# Altium PCB Proj_USB_GPIB.PcbDoc
Units mil, origin at the board's own origin, x right, y up, seen from the top; angles counter-clockwise.
Board outline 2800 x 2200 mil, 2 copper layers (Top Layer, Bottom Layer); 46 components, 61 nets, 226 pads, 77 vias.
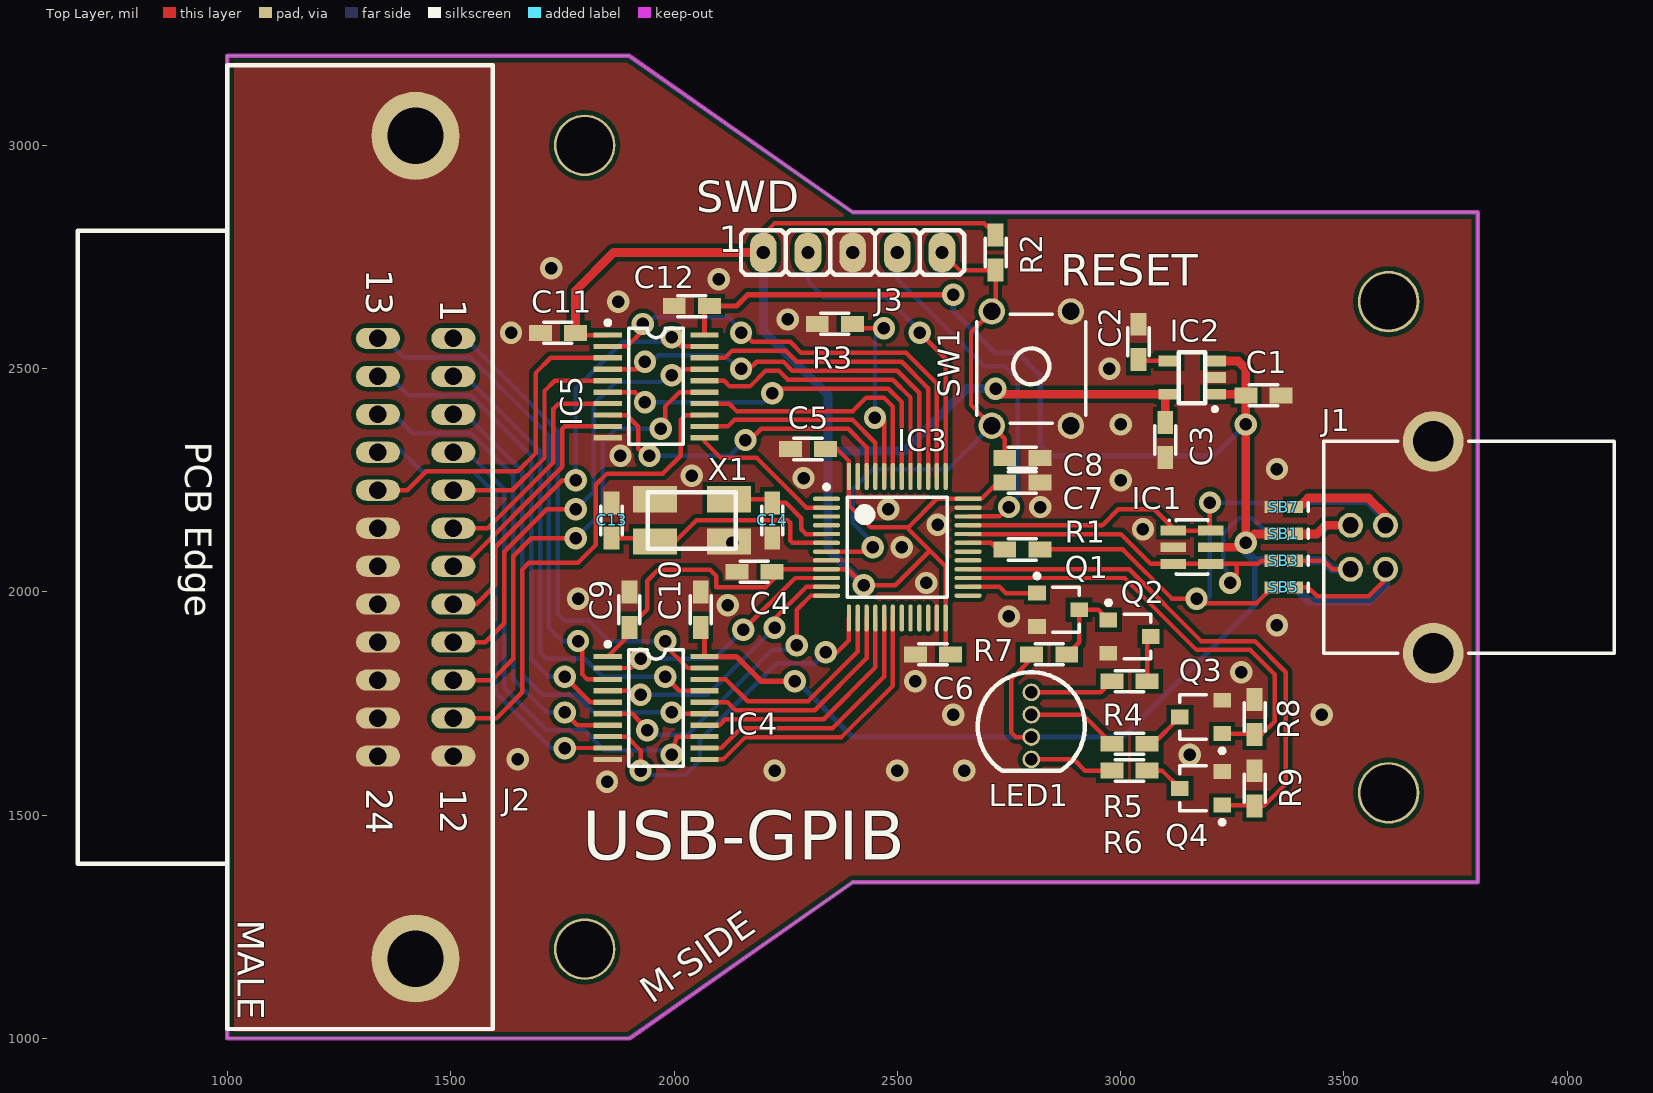
[diagram p0: Top Layer view]
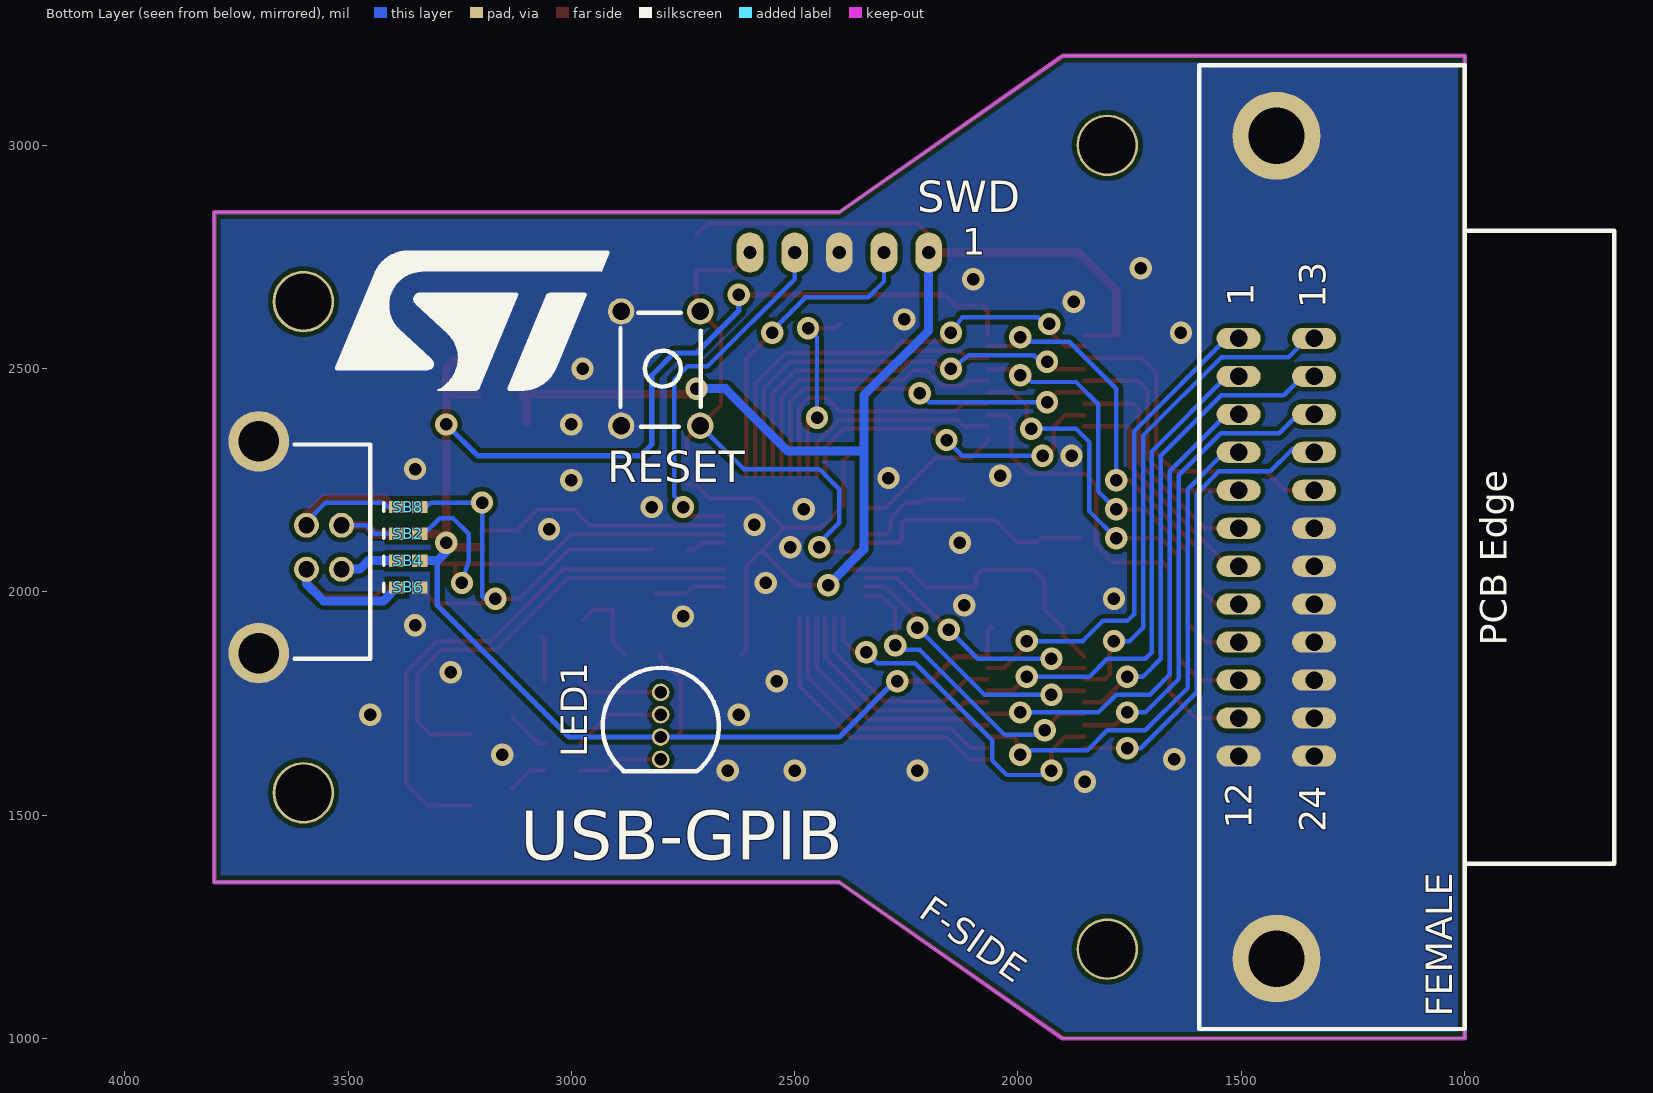
[diagram p1: Bottom Layer view, seen from below]

## Layer stack, top to bottom
Top Layer: signal copper 1.4
Dielectric: dielectric 12.6, FR-4, Dk 4.8
Bottom Layer: signal copper 1.4

## Board outline
1000,1000 1900,1000 2400,1350 3800,1350 3800,2850 2400,2850 1900,3200 1000,3200

## Design rules (kind name [scope] priority, off if disabled: settings)
Clearance [All] p1: gap=10
ComponentClearance [All] p1: gap=10 collisioncheckmode=3 verticalgap=10
HoleSize [All] p1: absolutevalues=TRUE maxlimit=196.85 minlimit=0.98 maxpercent=80.000 minpercent=20.000
PolygonConnect [All] p1: connectstyle=Direct reliefconductorwidth=10 reliefentries=4 polygonreliefangle="90 Angle"
RoutingVias [All] p1: holewidth=12 width=24 viastyle="Through Hole" minholewidth=12 minwidth=24 maxholewidth=12 maxwidth=24
SolderMaskExpansion [All] p1: expansion=4
TestPointUsage [All] p1: valid=0 allowmultiple=FALSE
Testpoint [All] p1: side=15 testpointundercomponent=TRUE minsize=40 maxsize=100 preferedsize=60 minholesize=0 maxholesize=40 preferedholesize=32 testpointgrid=1 style=1023 order=0123456789
Width [All] p1: maxlimit=50 minlimit=10 preferedwidth=10 minimp=50.000000 maximp=50.000000 favimp=50.000000
17 further rules are at their usual default settings.

## Components (designator, comment, footprint, x,y, rotation, side; value= is the part's Value field where it differs from the comment)
C1 "Cap" 0603 3320,2440 r0 top
C2 "Cap" 0603 3040,2560 r90 top
C3 "Cap" 0603 3100,2340 r270 top
C4 "Cap" 0603 2180,2045 r180 top
C5 "Cap" 0603 2300,2320 r180 top
C6 "Cap" 0603 2580,1860 r180 top
C7 "Cap" 0603 2780,2245 r0 top
C8 "Cap" 0603 2780,2300 r180 top
C9 "Cap" 0603 1900,1960 r90 top
C10 "Cap" 0603 2060,1960 r90 top
C11 "Cap" 0603 1740,2580 r180 top
C12 "Cap" 0603 2040,2640 r180 top
C13 "Cap" 0603 1860,2160 r90 top
C14 "Cap" 0603 2220,2160 r270 top
IC1 "USBLC6-2" SOT23-6 3160,2100 r270 top
IC2 "LDK130" SOT23-5 3160,2480 r90 top
IC3 "STM32F103C6T6A" STM-LQFP48_L 2500,2100 r0 top
IC4 "ST2378E" TSSOP20 1960,1740 r270 top
IC5 "ST2378E" TSSOP20 1960,2460 r270 top
J1 "USB 2.0 B" 61400416121 3780,2100 r90 top
J2 "Centronix 24P Male GPIB" Norcomp-112-024-213R001 1000,2100 r270 top
J3 "SWD" PIN_HEADER_5P 2400,2760 r0 top
LED1 "RGB LED 5mm CA" RGB_LED_5mm 2800,1700 r90 top
Q1 "BSS138" SOT23-3 2860,1960 r270 top
Q2 "BSS138" SOT23-3 3020,1900 r270 top
Q3 "BSS138" SOT23-3 3180,1720 r90 top
Q4 "BSS138" SOT23-3 3180,1560 r90 top
R1 "Res" 0603 2780,2095 r180 top
R2 "Res" 0603 2720,2760 r90 top
R3 "Res" 0603 2360,2600 r180 top
R4 "Res" 0603 3020,1800 r0 top
R5 "Res" 0603 3020,1660 r0 top
R6 "Res" 0603 3020,1600 r0 top
R7 "Res" 0603 2840,1860 r180 top
R8 "Res" 0603 3300,1720 r270 top
R9 "Res" 0603 3300,1560 r270 top
SB1 "SHORT_CON2" 0402 3365,2130 r180 top
SB2 "SHORT_CON2" 0402 3365,2130 r180 bottom
SB3 "SHORT_CON2" 0402 3365,2070 r180 top
SB4 "SHORT_CON2" 0402 3365,2070 r180 bottom
SB5 "SHORT_CON2" 0402 3365,2010 r180 top
SB6 "SHORT_CON2" 0402 3365,2010 r180 bottom
SB7 "SHORT_CON2" 0402 3365,2190 r180 top
SB8 "SHORT_CON2" 0402 3365,2190 r180 bottom
SW1 "6x6mm THT" 4301x60957x6 2800,2500 r270 top
X1 "8MHz" CRYSTAL_5x3.2mm 2040,2160 r0 top

## Footprints (in the part's own frame and the unit in brackets; to place one, negate y for a bottom-side part, rotate by r counter-clockwise, add the part's x,y. Pads: shape width x height; smd on the part's side, far side on the other; paste and mask are expansions set on the pad)
0402 [mm] "Chip Capacitor; Body 1.0 x 0.5 mm (LxW typ)"
  rect 0.9x0.7 smd: 1(-0.65,0) 2(0.65,0)
  silkscreen extent -1.4,-0.25 -1.4,0.25
0603 [mm]
  rect 1.3x0.9 smd: 1(-1,0) 2(1,0)
  silkscreen extent -0.8,-0.6 0.8,0.6, body extent -0.8,-0.4 0.8,0.4, height 0.5
4301x60957x6 [mm] "6x6mm Tact Switch, THT version"
  round 1.5 hole 1: 1(-3.25,2.25) 2(-3.25,-2.25) 3(3.25,2.25) 4(3.25,-2.25)
  silkscreen extent -3.1,-3.1 3.1,3.1, body extent -3.95,-3.1 3.95,3.1, height 9.55
61400416121 [mm] "USB 2.0 Type B Horizontal"
  round 1.42 hole 0.92: 1(1.25,6.74) 2(-1.25,6.74) 3(-1.25,4.74) 4(1.25,4.74)
  round 3.45 hole 2.3: Shell(-6.02,2.03) Shell(6.02,2.03)
  silkscreen extent -6.02,-8.25 6.02,8.25, body extent -7.48,-8.25 7.48,8.25, height 11.15
CRYSTAL_5x3.2mm [mm] "Quartz SMD Crystal 5x3.2mm"
  rect 2.5x1.5 smd: 1(-2.1,-1.2) 2(2.1,-1.2) 3(2.1,1.2) 4(-2.1,1.2)
  silkscreen extent -2.5,-1.6 2.5,1.6, body extent -2.63,-1.73 2.63,1.73
Norcomp-112-024-213R001 [mm] "Centronix 24P Male THT GPIB Connector"
  oval 1.2x2.5 hole 1: 1(-11.88,12.85) 2(-9.72,12.85) 3(-7.56,12.85) 4(-5.4,12.85) 5(-3.24,12.85) 6(-1.08,12.85) 7(1.08,12.85) 8(3.24,12.85) 9(5.4,12.85) 10(7.56,12.85) 11(9.72,12.85) 12(11.88,12.85) 13(-11.88,8.56) 14(-9.72,8.56) 15(-7.56,8.56) 16(-5.4,8.56) 17(-3.24,8.56) 18(-1.08,8.56) 19(1.08,8.56) 20(3.24,8.56) 21(5.4,8.56) 22(7.56,8.56) 23(9.72,8.56) 24(11.88,8.56)
  round 5 hole 3.2: SH(-23.4,10.7) SH(23.4,10.7)
  silkscreen extent -27.4,-8.5 27.4,15.1
PIN_HEADER_5P [mil]
  oval 60x90 hole 30: 1(-200,0) 2(-100,0) 3(0,0) 4(100,0) 5(200,0)
  silkscreen extent -250,-50 250,50, body extent -250,-50 250,50
RGB_LED_5mm [mm] "RGB LED 5mm Common Anode"
  round 1 hole 0.7: 1(-1.905,0) 2(-0.635,0) 3(0.635,0) 4(1.905,0)
  silkscreen extent -2.54,-3.05 3.04,3.05, body extent -2.54,-3.02 3.05,3.05
SOT23-3 [mm] "SOT-23; 3 Leads; Body 3.0 x 2.5 mm, inc. leads (LxW max)"
  rect 0.85x1 smd: 1(-0.95,-1.2) 2(0.95,-1.2) 3(0,1.2)
  silkscreen extent -2.05,-1.32 1.28,1.2
SOT23-5 [mm]
  rect 0.62x1.22 smd: 1(-0.95,-1.31) 2(0,-1.31) 3(0.95,-1.31) 4(0.95,1.31) 5(-0.95,1.31)
  silkscreen extent -1.9,-1.4 1.45,0.75
SOT23-6 [mm] "SOT-23/SC-74A; 5 Leads; Body 3.1 x 3 mm, inc. leads (LxW max)"
  rect 0.55x1.45 smd: 1(-0.95,-1.075) 2(0,-1.075) 3(0.95,-1.075) 4(0.95,1.075) 5(0,1.075) 6(-0.95,1.075)
  silkscreen extent -1.57,-1.35 1.55,0.9
STM-LQFP48_L [mm] "QFP, 48-Leads, Body 7x7mm, Pitch 0.5mm, IPC High Density"
  oval 1.55x0.25 smd: 1(-4.025,2.75) 2(-4.025,2.25) 3(-4.025,1.75) 4(-4.025,1.25) 5(-4.025,0.75) 6(-4.025,0.25) 7(-4.025,-0.25) 8(-4.025,-0.75) 9(-4.025,-1.25) 10(-4.025,-1.75) 11(-4.025,-2.25) 12(-4.025,-2.75) 25(4.025,-2.75) 26(4.025,-2.25) 27(4.025,-1.75) 28(4.025,-1.25) 29(4.025,-0.75) 30(4.025,-0.25) 31(4.025,0.25) 32(4.025,0.75) 33(4.025,1.25) 34(4.025,1.75) 35(4.025,2.25) 36(4.025,2.75)
  oval 0.25x1.55 smd: 13(-2.75,-4.025) 14(-2.25,-4.025) 15(-1.75,-4.025) 16(-1.25,-4.025) 17(-0.75,-4.025) 18(-0.25,-4.025) 19(0.25,-4.025) 20(0.75,-4.025) 21(1.25,-4.025) 22(1.75,-4.025) 23(2.25,-4.025) 24(2.75,-4.025) 37(2.75,4.025) 38(2.25,4.025) 39(1.75,4.025) 40(1.25,4.025) 41(0.75,4.025) 42(0.25,4.025) 43(-0.25,4.025) 44(-0.75,4.025) 45(-1.25,4.025) 46(-1.75,4.025) 47(-2.25,4.025) 48(-2.75,4.025)
  silkscreen extent -4.15,-2.85 2.85,3.55, body extent -3.5,-3.5 3.5,3.5, height 1.6
TSSOP20 [mm] "Shrink Small Outline; 20 Leads; Body Width 4.4 mm; Pitch 0.65 mm"
  rect 0.3x1.6 smd: 1(-2.925,-2.75) 2(-2.275,-2.75) 3(-1.625,-2.75) 4(-0.975,-2.75) 5(-0.325,-2.75) 6(0.325,-2.75) 7(0.975,-2.75) 8(1.625,-2.75) 9(2.275,-2.75) 10(2.925,-2.75) 11(2.925,2.75) 12(2.275,2.75) 13(1.625,2.75) 14(0.975,2.75) 15(0.325,2.75) 16(-0.325,2.75) 17(-0.975,2.75) 18(-1.625,2.75) 19(-2.275,2.75) 20(-2.925,2.75)
  silkscreen extent -3.75,-2.87 3.3,1.55

## Part data
C1 C2 C3 C4 C5 C6 C7 C8 C9 C10 C11 C12 C13 C14: "Capacitor"
IC1: "Very low capacitance ESD protection diode array"
IC2: "300 mA low quiescent current very low noise LDO"
IC3: "ARM Cortex-M3 32-bit MCU, 32 KB Flash, 10 KB Internal RAM, 37 I/Os, 48-pin LQFP, -40 to 85 degC, Tray"
IC4 IC5: "8-bit dual supply 1.71 V to 5.5 V level translator  with I/O VCC ±15 kV ESD protection"
J1: library part 61400416121, "USB 2.0 Type B, Receptacle, Horizontal, THT"
J2: "Centronix 24P Male THT GPIB Connector, Farnell 2421095"
J3: library part "Pin Header 5P"
LED1: "5mm RGB LED Common Anode, eg. OSTHMA5B61A"
Q1 Q2 Q3 Q4: "MOSFET SOT-23 N-CH LOGIC LEVEL"
R1 R2 R3 R4 R5 R6 R7 R8 R9: "Resistor"
SW1: library part 430186095716, "WS-TATV THT Tact Switch 6x6mm, height 9.5mm, 160gf"
X1: library part Crystal

## Free pads (board coordinates)
  round 137.79 hole 125.98: 3.2mm(1800,1200) 3.2mm(1800,3000) 3.2mm(3600,2650)
  round 137.8 hole 125.98: 3.2mm(3600,1550)

## Via types
v1: diameter 50, hole 28, Top Layer to Bottom Layer, 77 vias

## Nets (pads, with @x,y where several pads share a name; then routed paths per layer and width w, separated by ;. In a path a pad name is that pad's centre, name@x,y a point inside that pad or via, vN(x,y) a via of type N, cw(c..) or ccw(c..) an arc to the next point about the centre after c; other vN are vias at no path point)
3V3: C3.1 C4.1 C5.1 C6.1 C7.1 C9.1 C11.1 IC2.5 IC3.9 IC3.24 IC3.36 IC3.48 IC4.1 IC5.1 J3.1 R2.2 | length 4781.2
  Top Layer w10: C11.1 1784.21,2575.16 IC5.1 ; IC4.1 1900,1903.43 C9.1 1940,1960.63 1940,2025 1965,2050 2080,2050 2095,2035 2095,2010 2205,2010 2239.37,2044.37 2239.37,2050.79 2389.21,2050.79 v1(2425,2015) 2495.35,2015 2572.67,2092.33 ; J3.1 2200,2800 2225,2825 2694.37,2825 R2.2 ; C5.1 2365,2320 2391.73,2293.27 2391.73,2193.27 2440,2145 2525,2145 ; C6.1 2608.27,1871.1 2608.27,2056.73 2525,2140 2525,2145 ; C7.1@2740.63,2240 2720,2240 2688.27,2208.27 2588.27,2208.27 2525,2145
  Top Layer w20: C11.1 1779.37,2674.37 1865,2760 J3.1 ; v1(2720,2455) 2732.4,2442.6 IC2.5 3100,2434.17 C3.1
  Bottom Layer w20: J3.1 2200,2585 2345,2440 2345,2095 v1(2425,2015) ; 2345,2315 2515,2315 2655,2455 v1(2720,2455)
5V: C1.1 C10.1 C12.1 IC1.5 IC2.1 IC2.3 IC4.20 IC5.20 LED1.2 R7.2 SB1.2 SB4.2 | length 4183.2
  Top Layer w10: LED1.2 2765,1675 2755,1685 2755,1805 2800.63,1850.63 R7.2
  Top Layer w12: C10.1 2068.27,1912.36 IC4.20 2139.84,1855.16 2195,1800 v1(2270,1800) ; IC5.20 2068.27,2628.9 C12.1 2140,2640 2165,2665 v1(2625,2665)
  Top Layer w20: IC1.5 3270,2100 3300,2130 SB1.2 ; IC2.1 3277.16,2442.6 C1.1@3280.2,2439.57 ; IC2.3 3262.6,2517.4 3280.2,2499.8 v1(3280.2,2110.2)
  Bottom Layer w12: v1(2270,1800) 2275,1800 2400,1675 3005,1675 3300,1970 3300,2070 ; v1(2625,2665) 2625,2630 2720,2535 2770,2535 2820,2485 2820,2330 2845,2305 3210.2,2305 v1(3280.2,2375)
  Bottom Layer w20: v1(3280.2,2110.2) 3280.2,2089.8 3300,2070 SB4.2
5V/DM: J1.1 SB1.1 SB2.1 | length 264
  Top Layer w20: SB1.1 3440,2130 3459.21,2149.21 J1.1
  Bottom Layer w10: SB2.1 3440,2130 3459.21,2149.21 J1.1
ATN: IC5.13 J2.11 | length 1130.5
  Top Layer w10: J2.11 1602.32,1717.32 1660,1775 1660,2050 1675,2065 1785,2065 1825,2105 1825,2240 1850,2265 1975,2265 2015,2305 2015,2385 2026.02,2396.02 IC5.13
B: LED1.3 R5.1 | length 207.6
  Top Layer w10: LED1.3 2915.63,1725 R5.1
BOOT0: IC3.44 R3.1 | length 430.3
  Top Layer w10: R3.1 2409.37,2590 v1(2470,2590) ; v1(2450,2390) 2470.47,2384.53 IC3.44
  Bottom Layer w10: v1(2450,2390) 2450,2570 v1(2470,2590)
BYP: C2.1 IC2.4 | length 69.8
  Top Layer w10: C2.1 3043.23,2517.4 IC2.4
DAV: IC5.7 J2.6 | length 531.7
  Top Layer w10: J2.6 1582.52,2142.52 1730,2290 1730,2410 1741.61,2421.61 IC5.7
DIO1: IC4.19 J2.1 | length 1114.1
  Top Layer w10: v1(1980,1890) 1980,1880 2030.43,1829.57 IC4.19
  Bottom Layer w10: J2.1 1532.28,2567.72 1740,2360 1740,1950 1755,1935 1810,1935 1855,1890 v1(1980,1890)
DIO2: IC4.17 J2.2 | length 1117.7
  Top Layer w10: v1(1980,1810) 2011.61,1778.39 IC4.17
  Bottom Layer w10: J2.2 1532.32,2482.68 1700,2315 1700,1865 1715,1850 1800,1850 1840,1810 v1(1980,1810)
DIO3: IC4.15 J2.3 | length 1109.5
  Top Layer w10: v1(1995,1730) 2010,1735 2017.8,1727.2 IC4.15
  Bottom Layer w10: J2.3 1532.36,2397.64 1660,2270 1660,1815 1705,1770 1780,1770 1820,1730 v1(1995,1730)
DIO4: IC4.13 J2.4 | length 1135.2
  Top Layer w10: v1(1995,1635) 2006.02,1676.02 IC4.13
  Bottom Layer w10: J2.4 1537.4,2312.6 1620,2230 1620,1785 1715,1690 1800,1690 1845,1645 1970,1645 1980,1635 v1(1995,1635)
DIO5: IC4.3 J2.13 | length 1121
  Top Layer w10: v1(1785,1890) 1795,1880 1795,1815 1806.02,1803.98 IC4.3
  Bottom Layer w10: J2.13 1352.28,2567.72 1395,2525 1545,2525 1720,2350 1720,1920 1750,1890 v1(1785,1890)
DIO6: IC4.5 J2.14 | length 1083.6
  Top Layer w10: v1(1755,1810) 1812.2,1752.8 IC4.5
  Bottom Layer w10: J2.14 1362.32,2482.68 1405,2440 1545,2440 1680,2305 1680,1850 1720,1810 v1(1755,1810)
DIO7: IC4.7 J2.15 | length 1070.3
  Top Layer w10: v1(1755,1730) 1783.39,1701.61 IC4.7
  Bottom Layer w10: J2.15 1372.36,2397.64 1415,2355 1546.25,2355 1640,2261.25 1640,1805 1715,1730 v1(1755,1730)
DIO8: IC4.9 J2.16 | length 1044.5
  Top Layer w10: v1@1755.43,1650.43 IC4.9
  Bottom Layer w10: J2.16@1345,2320 1385,2320 1435,2270 1550,2270 1600,2220 1600,1775 1725,1650 v1(1755,1650)
DM/5V: J1.2 SB3.1 SB4.1 | length 264
  Top Layer w10: SB3.1 3455,2070 3474.21,2050.79 J1.2
  Bottom Layer w20: SB4.1 3455,2070 3474.21,2050.79 J1.2
DP/GND: J1.3 SB5.1 SB6.1 | length 517.3
  Top Layer w10: SB5.1 3420,2010 3440,1990 3555,1990 3593.39,2028.39 J1.3
  Top Layer w20: SB5.1 SB5.1@3395,2010
  Bottom Layer w20: SB6.1 3420.59,1980 3555,1980 3593.39,2018.39 J1.3
EOI: IC5.5 J2.5 | length 535.3
  Top Layer w10: J2.5 1637.56,2227.56 1710,2300 1710,2450 1732.8,2472.8 IC5.5
G: LED1.1 R6.1 | length 191
  Top Layer w10: LED1.1 2895,1625 2920,1600 R6.1
GND: C1.2 C2.2 C3.2 C4.2 C5.2 C6.2 C7.2 C8.1 C9.2 C10.2 C11.2 C12.2 C13.2 C14.2 IC1.2 IC2.2 IC3.8 IC3.23 IC3.35 IC3.47 IC4.10 IC5.10 J1.Shell J2.12 J2.18 J2.19 J2.20 J2.21 J2.22 J2.23 J2.24 J2.SH J3.3 Q1.2 Q2.2 Q3.2 Q4.2 R3.2 R8.1 R9.1 SB6.2 SB7.2 SW1.1 SW1.3 X1.2 X1.4
  other v1: 1850,1575 2225,1600 2500,1600 2650,1600 1650,1625 3155,1635 2625,1725 3450,1725 2540,1800 3270,1820 3350,1925 2750,1945 2120,1970 1785,1985 2565,2020 2510,2100 2130,2110 3050,2140 2590,2150 2480,2185 2820,2190 3000,2250 2290,2255 2040,2260 3350,2275 1880,2305 3000,2375 2975,2500 1635,2580 2255,2610 1875,2650 2100,2700 1725,2725
GND/DP: J1.4 SB7.1 SB8.1 | length 481.7
  Top Layer w20: SB7.1 3400,2190 3420,2210 3555,2210 3593.39,2171.61 J1.4
  Bottom Layer w10: SB8.1 3410,2190 3420,2200 3550,2200 3593.39,2156.61 J1.4
IFC: IC5.17 J2.9 | length 1023.4
  Top Layer w10: J2.9 1577.4,1887.4 1620,1930 1620,2090 1715,2185 v1(1780,2185) ; v1(1995,2485) 2008.39,2498.39 IC5.17
  Bottom Layer w10: v1(1780,2185) 1820,2225 1820,2420 1870,2470 1970,2470 1985,2485 v1(1995,2485)
NDAC: IC5.19 J2.8 | length 988.2
  Top Layer w10: J2.8 1557.44,1972.44 1600,2015 1600,2100 1750,2250 v1(1780,2250) ; v1(1995,2570) 2015.43,2549.57 IC5.19
  Bottom Layer w10: v1(1780,2250) 1780,2455 1885,2560 1975,2560 1985,2570 v1(1995,2570)
NetC13_1: C13.1 IC3.6 X1.1 | length 548.6
  Top Layer w10: C13.1 1949.45,2120.63 X1.1 2002.76,2112.76 2050,2160 2255,2160 2260,2155 2260,2115 2265.16,2109.84 IC3.6
NetC14_1: C14.1 IC3.5 X1.3 | length 265.7
  Top Layer w10: X1.3 2212.13,2207.24 C14.1 2250.63,2199.37 2285,2165 2285,2140 2295.47,2129.53 IC3.5
NRFD: IC5.9 J2.7 | length 525.2
  Top Layer w10: J2.7 1527.48,2057.48 1750,2280 1750,2365 1755.43,2370.43 IC5.9
NRST: C8.2 IC3.7 J3.5 R2.1 SW1.2 SW1.4 | length 1236.9
  Top Layer w10: IC3.7 2435.16,2090.16 v1(2445,2100) ; J3.5 2639.37,2720.63 R2.1 SW1.2@2720,2625 ; SW1.2 2665,2581.54 2665,2418.46 2740.63,2342.83 C8.2
  Bottom Layer w10: v1(2445,2100) 2445,2110 2400,2155 2400,2230 2445,2275 2614.37,2275 SW1.4
PA0: IC3.10 IC4.2 | length 573.3
  Top Layer w10: IC4.2 1904.57,1829.57 v1(1925,1850) ; v1(2155,1915) 2271.1,2031.1 IC3.10
  Bottom Layer w10: v1(1925,1850) 2090,1850 v1(2155,1915)
PA1: IC3.11 IC4.4 | length 605
  Top Layer w10: IC4.4 1916.61,1778.39 v1(1925,1770) ; v1(2225,1920) 2225,1940 2296.42,2011.42 IC3.11
  Bottom Layer w10: v1(1925,1770) 2075,1770 v1(2225,1920)
PA2: IC3.12 IC4.6 | length 689
  Top Layer w10: IC4.6 1907.8,1727.2 v1(1940,1690) ; v1(2275,1880) 2275,1960 2306.73,1991.73 IC3.12
  Bottom Layer w10: v1(1940,1690) 1950,1680 2030,1680 2220,1870 2270,1870 v1(2275,1880)
PA3: IC3.13 IC4.8 | length 803.1
  Top Layer w10: IC4.8 1893.98,1676.02 1925,1645 v1(1925,1600) ; v1(2340,1865) 2365,1865 2391.73,1891.73 IC3.13
  Bottom Layer w10: v1(1925,1600) 1930,1600 1940,1590 2025,1590 2057.5,1622.5 2057.5,1667.5 2230,1840 2315,1840 v1(2340,1865)
PA4: IC3.14 IC4.18 | length 484.7
  Top Layer w10: IC4.18 2116.02,1803.98 2165,1755 2300,1755 2411.42,1866.42 IC3.14
PA5: IC3.15 IC4.16 | length 508.7
  Top Layer w10: IC4.16 2119.7,1752.8 2137.5,1735 2315,1735 2431.1,1851.1 IC3.15
PA6: IC3.16 IC4.14 | length 546.8
  Top Layer w10: IC4.14 2101.61,1701.61 2115,1715 2335,1715 2450.79,1830.79 IC3.16
PA7: IC3.17 IC4.12 | length 599.6
  Top Layer w10: IC4.12 2105.43,1650.43 2150,1695 2355,1695 2470.47,1810.47 IC3.17
PA15: IC3.38 IC5.2 | length 1045.8
  Top Layer w10: IC5.2 1894.57,2549.57 1930,2585 v1(1930,2600) ; v1(2150,2580) 2155,2580 2175,2560 2260,2560 2285,2535 2520,2535 2588.58,2466.42 IC3.38
  Bottom Layer w10: v1(1930,2600) 1940,2600 1955,2615 2125,2615 v1(2150,2580)
PB0: IC3.18 IC4.11 | length 641.7
  Top Layer w10: IC4.11 2109.84,1624.84 2160,1675 2375,1675 2490.16,1790.16 IC3.18
PB3: IC3.39 IC5.18 | length 739.7
  Top Layer w10: IC5.18 2113.98,2523.98 2130,2540 2250,2540 2275,2515 2510,2515 2568.9,2456.1 IC3.39
PB4: IC3.40 IC5.4 | length 942.8
  Top Layer w10: IC5.4 1918.39,2498.39 v1(1935,2515) ; v1(2150,2500) 2170,2500 2185,2515 2245,2515 2265,2495 2500,2495 2549.21,2445.79 IC3.40
  Bottom Layer w10: v1(1935,2515) 1950,2515 1965,2530 2110,2530 v1(2150,2500)
PB5: IC3.41 IC5.16 | length 682.7
  Top Layer w10: IC5.16 2112.2,2472.8 2125,2460 2170,2460 2205,2495 2235,2495 2255,2475 2490,2475 2529.53,2435.47 IC3.41
PB6: IC3.42 IC5.6 | length 858.8
  Top Layer w10: IC5.6 1912.8,2447.2 v1(1935,2425) ; v1(2220,2445) 2225,2445 2235,2455 2480,2455 2509.84,2425.16 IC3.42
  Bottom Layer w10: v1(1935,2425) 2200,2425 v1(2220,2445)
PB7: IC3.43 IC5.14 | length 605.9
  Top Layer w10: IC5.14 2123.39,2421.61 2140,2405 2400,2405 2430,2435 2470,2435 2490.16,2414.84 IC3.43
PB8: IC3.45 IC5.12 | length 485.3
  Top Layer w10: IC5.12 2120.43,2370.43 2135,2385 2400,2385 2450.79,2334.21 IC3.45
PB9: IC3.46 IC5.8 | length 751.6
  Top Layer w10: IC5.8 1893.98,2396.02 1920,2370 1920,2320 v1(1945,2305) ; v1(2160,2340) 2170,2340 2195,2365 2390,2365 2431.1,2323.9 IC3.46
  Bottom Layer w10: v1(1945,2305) 2125,2305 v1(2160,2340)
PB13: IC3.26 Q1.1 | length 160.1
  Top Layer w10: IC3.26 2728.58,2011.42 2742.6,1997.4 Q1.1
PB14: IC3.27 Q3.1 R8.2 | length 1011.8
  Top Layer w10: IC3.27 3008.9,2031.1 3170,1870 3290,1870 3345,1815 3345,1710 3315.63,1680.63 R8.2 3298.03,1682.6 Q3.1
PB15: IC3.28 Q4.1 R9.2 | length 1221.2
  Top Layer w10: IC3.28 3019.21,2050.79 3180,1890 3300,1890 3370,1820 3370,1570 3320.63,1520.63 R9.2 3298.03,1522.6 Q4.1
PC13: IC3.2 IC5.11 | length 342.7
  Top Layer w10: IC5.11 2068.27,2336.73 2105,2300 2185,2300 2296.42,2188.58 IC3.2
Q1D: Q1.3 Q2.1 R7.1 | length 186.8
  Top Layer w10: R7.1 2880,1860 2907.24,1887.24 Q1.3 2950.16,1960 Q2.1
Q2D: Q2.3 R4.2 | length 103.3
  Top Layer w10: R4.2 3059.37,1892.13 Q2.3
Q3D: Q3.3 R5.2 | length 98.2
  Top Layer w10: R5.2 3072.76,1660 Q3.3
Q4D: Q4.3 R6.2 | length 90
  Top Layer w10: R6.2 3092.76,1600 Q4.3
R: LED1.4 R4.1 | length 191
  Top Layer w10: LED1.4 2955.63,1775 R4.1
REN: IC5.3 J2.17 | length 742.9
  Top Layer w10: J2.17 1402.56,2227.56 1445,2270 1650,2270 1690,2310 1690,2490 1723.98,2523.98 IC5.3
SRQ: IC5.15 J2.10 | length 1078.4
  Top Layer w10: J2.10 1592.36,1802.36 1640,1850 1640,2080 1680,2120 v1(1780,2120) ; v1(1970,2365) 1980,2375 1980,2415 2012.2,2447.2 IC5.15
  Bottom Layer w10: v1(1780,2120) 1840,2180 1840,2335 1870,2365 v1(1970,2365)
SWCLK: IC3.37 J3.2 | length 711.2
  Top Layer w10: v1(2550,2580) 2608.27,2521.73 IC3.37
  Bottom Layer w10: J3.2 2300,2695 2335,2660 2475,2660 2550,2585 v1(2550,2580)
SWDIO: IC3.34 J3.4 | length 823.8
  Top Layer w10: IC3.34 2728.9,2168.9 v1(2750,2190)
  Bottom Layer w10: J3.4 2500,2700 2695,2505 2740,2505 2770,2475 2770,2215 2745,2190 v1(2750,2190)
USB_DM: IC1.3 IC1.4 IC3.32 SB2.2 SB3.2 | length 1009.9
  Top Layer w10: IC3.32 3000.47,2129.53 3067.4,2062.6 3307.6,2062.6 3315,2070 SB3.2 ; v1(3245,2020) 3260,2040 3260,2062.6
  Bottom Layer w10: v1(3245,2020) 3230,2070 3230,2130 3265,2165 3295,2165 3330,2130 SB2.2
USB_DP: IC1.1 IC1.6 IC3.33 R1.1 SB5.2 SB8.2 | length 1611.1
  Top Layer w10: IC3.33 2959.21,2149.21 2995,2185 3075,2185 3117.68,2142.32 IC1.1 IC1.6 ; R1.1 3005,2095 3115,1985 v1(3170,1985) 3180,1975 3304.41,1975 SB5.2 ; IC1.6@3200,2140 v1(3200,2200)
  Bottom Layer w10: v1(3170,1985) 3195,1985 3200,1990 v1(3200,2200) 3315,2200 3325,2190 SB8.2
USB_EN: IC3.31 R1.2 | length 88.3
  Top Layer w10: IC3.31 2710.16,2109.84 2725,2095 R1.2
pads on no net: IC3.1 IC3.3 IC3.4 IC3.19 IC3.20 IC3.21 IC3.22 IC3.25 IC3.29 IC3.30

## Polygon pours and split planes (outlines as drawn)
GND on Top Layer "Bottom Layer-No Net" (solid, remove dead copper, pour order 1000): 1000,3200 1900,3200 2400,2850 3800,2850 3800,1350 2400,1350 1900,1000 1000,1000
GND on Bottom Layer "Bottom Layer-No Net" (solid, remove dead copper, pour order 1001): 1000,3200 1900,3200 2400,2850 3800,2850 3800,1350 2400,1350 1900,1000 1000,1000

## Keep-outs
Keep-Out Layer:
  the board outline again, w10

## Silkscreen, mask and mechanical layers (free items; w line width, h text height)
Top Overlay:
  circle w10: c2800,2505 r40.31
  text "SWD" at 2050,2850 h70
  text "1" at 2100,2760 h60
  text "RESET" at 2865,2685 h70
  text "USB-GPIB" at 1795,1400 h110
  text "M-SIDE" at 1950,1075 h60 r35
Bottom Overlay:
  drawing of 13 lines, arcs and shapes, not listed
  text "SWD" at 2225,2850 h70
  text "1" at 2125,2755 h60
  text "RESET" at 2920,2245 h70
  text "LED1" at 2965,1630 h60 r270
  text "USB-GPIB" at 3115,1400 h110
  text "F-SIDE" at 2225,1275 h60 r35

## Text inside footprints (layer, text, board x,y; h text height)
J2: Top Overlay "MALE" at 1023.62,1265.35 h60 r270; Top Overlay "PCB Edge" at 905.51,2336.22 h60 r270; Top Overlay "1" at 1476.38,2655.12 h60 r270; Top Overlay "13" at 1311.02,2722.05 h60 r270; Top Overlay "12" at 1476.38,1560.63 h60 r270; Top Overlay "24" at 1311.02,1560.63 h60 r270; Bottom Overlay "24" at 1311.02,1462.2 h60 r270; Bottom Overlay "12" at 1476.38,1470.08 h60 r270; Bottom Overlay "13" at 1311.02,2635.43 h60 r270; Bottom Overlay "1" at 1472.44,2639.37 h60 r270; Bottom Overlay "PCB Edge" at 905.51,1879.53 h60 r270; Bottom Overlay "FEMALE" at 1027.56,1048.82 h60 r270